# Altium PCB investigator_oring.PcbDoc
Units mil, origin at the board's own origin, x right, y up, seen from the top; angles counter-clockwise.
Board outline 2000 x 4500 mil, 2 copper layers (Top Layer, Bottom Layer); 28 components, 16 nets, 100 pads, 0 vias.
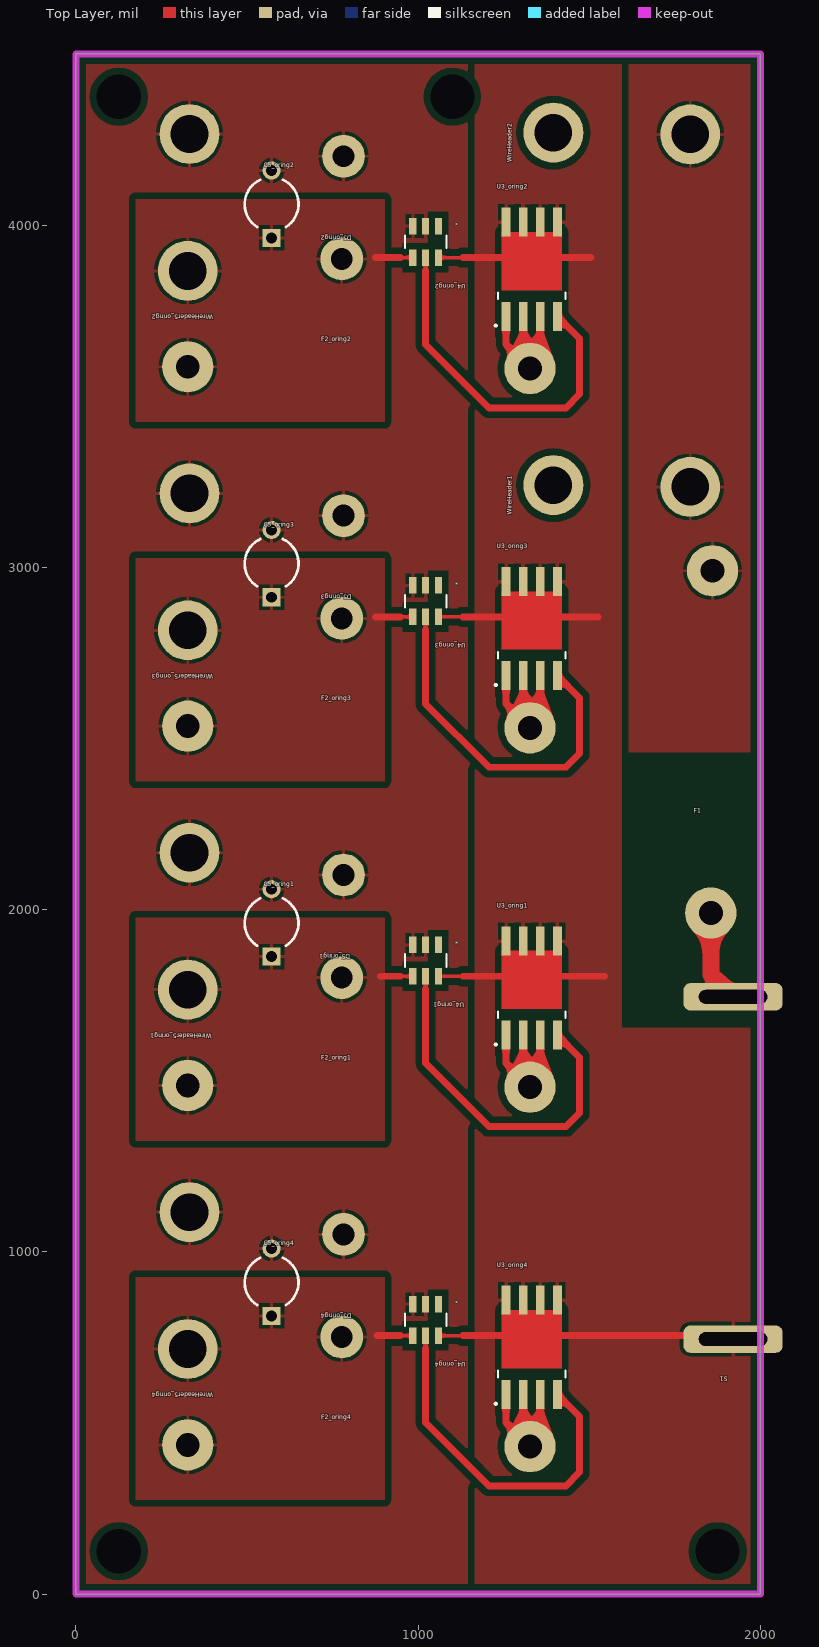
[diagram p0: Top Layer view]
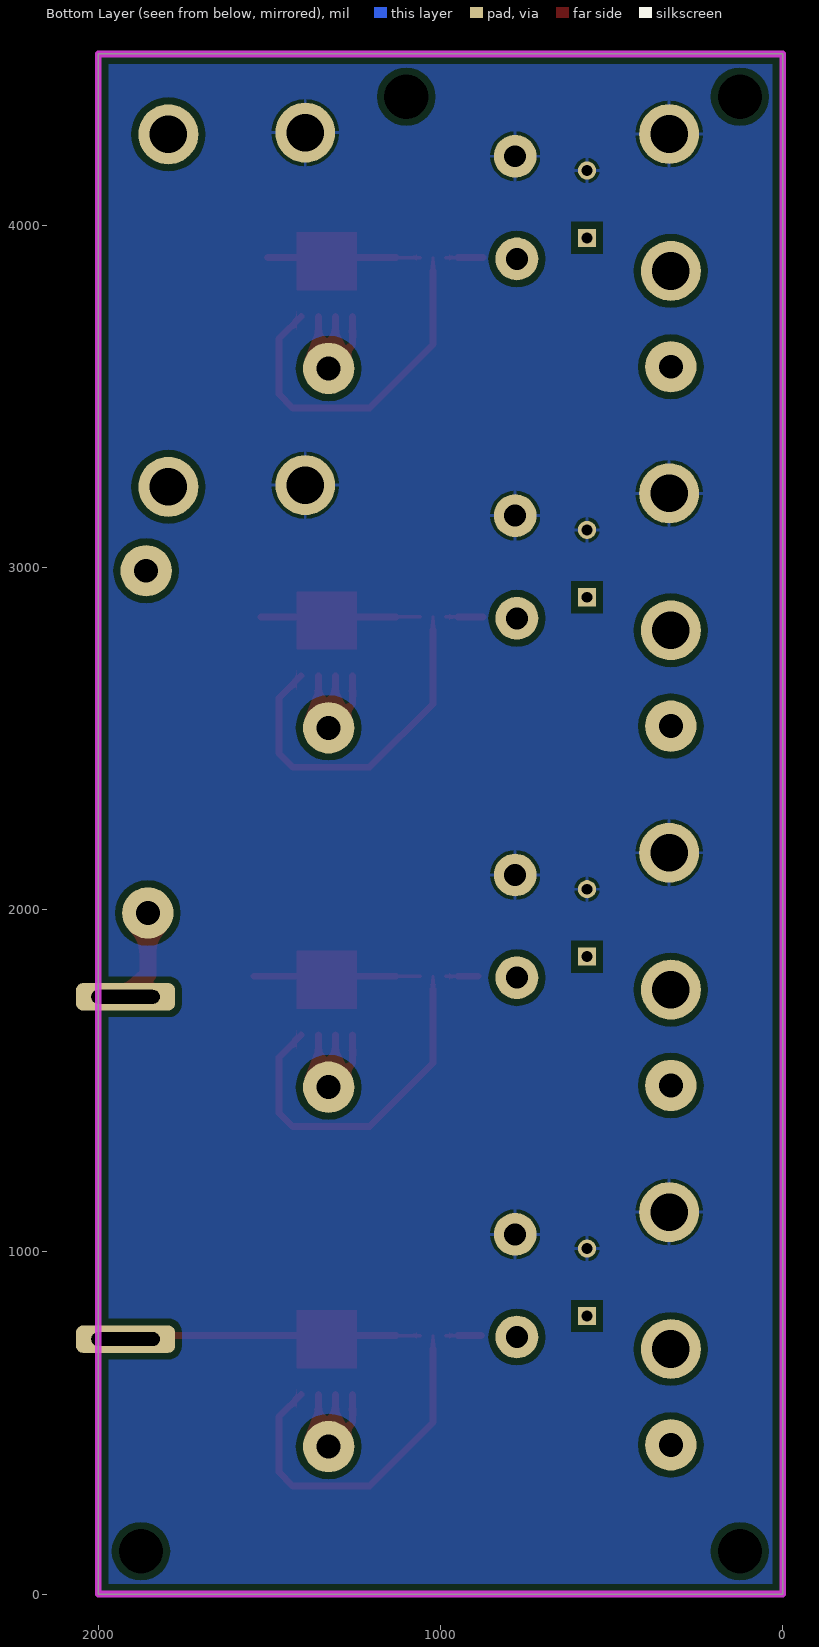
[diagram p1: Bottom Layer view, seen from below]

## Layer stack, top to bottom
Top Solder: solder mask 0.4, Solder Resist, Dk 3.5
Top Layer: signal copper 1.4
Dielectric 1: dielectric 12.6, FR-4, Dk 4.8
Bottom Layer: signal copper 1.4
Bottom Solder: solder mask 0.4, Solder Resist, Dk 3.5

## Board outline
0,0 0,4500 2000,4500 2000,0

## Design rules (kind name [scope] priority, off if disabled: settings)
Clearance SmallStuff [(HasFootprint('DQJ8') OR HasFootprint('MK06A') OR HasFootprint('C0805')) vs Not InPolygon] p1: gap=7
Clearance [All] p2: gap=20
PolygonConnect [All] p1: connectstyle=Relief reliefconductorwidth=10 reliefentries=4 polygonreliefangle="90 Angle" airgapwidth=10
RoomDefinition LM5050_ROOM [InComponentClass('LM5050_ROOM')] p1: confinementstyle=ConfineIn formatcopy=TRUE lockcomponents=FALSE outline 948.19,717 948.19,885 1130,885 1130,717
RoomDefinition oring4 [InComponentClass('oring4')] p2: confinementstyle=ConfineIn formatcopy=TRUE lockcomponents=FALSE outline 151.69,251 1501.69,251 1501.69,1221 151.69,1221
RoomDefinition oring3 [InComponentClass('oring3')] p3: confinementstyle=ConfineIn formatcopy=TRUE lockcomponents=FALSE outline 151.69,2351 1501.69,2351 1501.69,3321 151.69,3321
RoomDefinition oring2 [InComponentClass('oring2')] p4: confinementstyle=ConfineIn formatcopy=TRUE lockcomponents=FALSE outline 151.69,3401 1501.69,3401 1501.69,4371 151.69,4371
RoomDefinition oring1 [InComponentClass('oring1')] p5: confinementstyle=ConfineIn formatcopy=TRUE lockcomponents=FALSE outline 151.69,1301 1501.69,1301 1501.69,2271 151.69,2271
RoutingVias [All] p1: holewidth=28 width=50 viastyle="Through Hole" minholewidth=28 minwidth=50 maxholewidth=28 maxwidth=50
SMDNeckDown [All] p1: percent=75.000
SolderMaskExpansion [All] p1: expansion=4
Width SmallWidth [TouchesRoom('LM5050_ROOM')] p1: maxlimit=50 minlimit=5 preferedwidth=10 minimp=50.000000 maximp=50.000000 favimp=50.000000
Width [All] p2: maxlimit=50 minlimit=20 preferedwidth=20 minimp=50.000000 maximp=50.000000 favimp=50.000000
30 further rules are at their usual default settings.

## Classes and differential pairs
component class "Room Definition 1": U4_oring4
component class investigator_oring: F1 S1 WireHeader1 WireHeader2
component class oring1: C5_oring1 D5_oring1 F2_oring1 U3_oring1 U4_oring1 WireHeader5_oring1
component class oring2: C5_oring2 D5_oring2 F2_oring2 U3_oring2 U4_oring2 WireHeader5_oring2
component class oring3: C5_oring3 D5_oring3 F2_oring3 U3_oring3 U4_oring3 WireHeader5_oring3
component class oring4: C5_oring4 D5_oring4 F2_oring4 U3_oring4 U4_oring4 WireHeader5_oring4
net class VORED[1..4]: VORED4
channel class oring_circuit: oring1 oring2 oring3 oring4

## Components (designator, comment, footprint, x,y, rotation, side; value= is the part's Value field where it differs from the comment)
C5_oring1 "Cap2" CAPR5-4X5 571.69,1961 r90 top (schematic designator C5)
C5_oring2 "Cap2" CAPR5-4X5 571.69,4061 r90 top (schematic designator C5)
C5_oring3 "Cap2" CAPR5-4X5 571.69,3011 r90 top (schematic designator C5)
C5_oring4 "Cap2" CAPR5-4X5 571.69,911 r90 top (schematic designator C5)
D5_oring1 "D Schottky" DIODE 781.69,2101 r270 top (schematic designator D5)
D5_oring2 "D Schottky" DIODE 781.69,4201 r270 top (schematic designator D5)
D5_oring3 "D Schottky" DIODE 781.69,3151 r270 top (schematic designator D5)
D5_oring4 "D Schottky" DIODE 781.69,1051 r270 top (schematic designator D5)
F1 "Fuse 2" FUSE 1855,1990 r90 top
F2_oring1 "Fuse 2" FUSE 326.69,1486 r0 top (schematic designator F2)
F2_oring2 "Fuse 2" FUSE 326.69,3586 r0 top (schematic designator F2)
F2_oring3 "Fuse 2" FUSE 326.69,2536 r0 top (schematic designator F2)
F2_oring4 "Fuse 2" FUSE 326.69,436 r0 top (schematic designator F2)
S1 "SW-SPST" switch 1920,1245 r180 top
U3_oring1 "CSD17522Q5A_DQJ_" DQJ8 1331.69,1771 r90 top (schematic designator U3)
U3_oring2 "CSD17522Q5A_DQJ_" DQJ8 1331.69,3871 r90 top (schematic designator U3)
U3_oring3 "CSD17522Q5A_DQJ_" DQJ8 1331.69,2821 r90 top (schematic designator U3)
U3_oring4 "CSD17522Q5A_DQJ_" DQJ8 1331.69,721 r90 top (schematic designator U3)
U4_oring1 "LM5050-2_DDC_6" MK06A 1021.69,1851 r270 top (schematic designator U4)
U4_oring2 "LM5050-2_DDC_6" MK06A 1021.69,3951 r270 top (schematic designator U4)
U4_oring3 "LM5050-2_DDC_6" MK06A 1021.69,2901 r270 top (schematic designator U4)
U4_oring4 "LM5050-2_DDC_6" MK06A 1021.69,801 r270 top (schematic designator U4)
WireHeader1 "14 Gauge WIre" WireHeader 1795,3235 r180 top
WireHeader2 "14 Gauge WIre" WireHeader 1795,4265 r180 top
WireHeader5_oring1 "14 Gauge WIre" WireHeader 331.69,2166 r270 top (schematic designator WireHeader5)
WireHeader5_oring2 "14 Gauge WIre" WireHeader 331.69,4266 r270 top (schematic designator WireHeader5)
WireHeader5_oring3 "14 Gauge WIre" WireHeader 331.69,3216 r270 top (schematic designator WireHeader5)
WireHeader5_oring4 "14 Gauge WIre" WireHeader 331.69,1116 r270 top (schematic designator WireHeader5)

## Footprints (in the part's own frame and the unit in brackets; to place one, negate y for a bottom-side part, rotate by r counter-clockwise, add the part's x,y. Pads: shape width x height; smd on the part's side, far side on the other; paste and mask are expansions set on the pad)
CAPR5-4X5 [mm] "Capacitor; 2 Leads"
  rect 1.35x1.35 hole 0.8: 1(-2.5,0)
  round 1.35 hole 0.8: 2(2.5,0)
  silkscreen extent -1.69,-2 1.82,2
DIODE [mil]
  round 125 hole 64: 1(0,0) 2(300,-5)
DQJ8 [mm]
  rect 2.154x0.65 smd paste-0.1: 1(-3.497,1.905) 2(-3.497,0.635) 3(-3.497,-0.635) 4(-3.497,-1.905) 5(3.497,-1.905) 6(3.497,-0.635) 7(3.497,0.635) 8(3.497,1.905)
  Top Layer region: 2.745,0 2.745,2.23 -1.545,2.23 -1.545,0
  Top Layer region: 2.745,0 2.745,-2.23 -1.545,-2.23 -1.545,0
  silkscreen extent -4.27,-2.5 -1.74,2.74
FUSE [mil]
  round 150 hole 70: 1(0,0) 2(1000,-5)
MK06A [mil]
  rect 48x21 smd: 1(-46,37.4) 2(-46,0) 3(-46,-37.4) 4(46,-37.4) 5(46,0) 6(46,37.4)
  silkscreen extent -18,-60 18,61
switch [mil]
  rrect50% 290x80 hole 40 slot 200 at 0 deg: 1(0,500) 2(0,-500)
WireHeader [mil]
  round 175 hole 110: 1(0,0) 2(400,-5)

## Part data
C5_oring1 C5_oring2 C5_oring3 C5_oring4: "Capacitor"
D5_oring1 D5_oring2 D5_oring3 D5_oring4: "Schottky Diode"
F1 F2_oring1 F2_oring2 F2_oring3 F2_oring4: "Fuse"
S1: "Single-Pole, Single-Throw Switch"
U3_oring1 U3_oring2 U3_oring3 U3_oring4 U4_oring1 U4_oring2 U4_oring3 U4_oring4: "Imported"
WireHeader1 WireHeader2 WireHeader5_oring1 WireHeader5_oring2 WireHeader5_oring3 WireHeader5_oring4: library part WireHeader

## Free pads (board coordinates)
  round 60 hole 129: 1(1100,4375) 2(1875,125) 4(125,4375)
  round 0 hole 129: 3(125,125)

## Nets (pads, with @x,y where several pads share a name; then routed paths per layer and width w, separated by ;. In a path a pad name is that pad's centre, name@x,y a point inside that pad or via, vN(x,y) a via of type N, cw(c..) or ccw(c..) an arc to the next point about the centre after c; other vN are vias at no path point)
12V_UNREG: F1.2 WireHeader1.1 WireHeader2.1
BAT_oring1: C5_oring1.1 D5_oring1.2 F2_oring1.1 U4_oring1.4 WireHeader5_oring1.2 | length 94.3
  Top Layer w10: 948.19,1805 U4_oring1.4
  Top Layer w20: 890,1805 948.19,1805
BAT_oring2: C5_oring2.1 D5_oring2.2 F2_oring2.1 U4_oring2.4 WireHeader5_oring2.2 | length 109.3
  Top Layer w10: 948.19,3905 U4_oring2.4
  Top Layer w20: 875,3905 948.19,3905
BAT_oring3: C5_oring3.1 D5_oring3.2 F2_oring3.1 U4_oring3.4 WireHeader5_oring3.2 | length 109.3
  Top Layer w10: 948.19,2855 U4_oring3.4
  Top Layer w20: 875,2855 948.19,2855
BAT_oring4: C5_oring4.1 D5_oring4.2 F2_oring4.1 U4_oring4.4 WireHeader5_oring4.2 | length 104.3
  Top Layer w10: 948.19,755 U4_oring4.4
  Top Layer w20: 880,755 948.19,755
GND: C5_oring1.2 C5_oring2.2 C5_oring3.2 C5_oring4.2 D5_oring1.1 D5_oring2.1 D5_oring3.1 D5_oring4.1 U4_oring1.2 U4_oring1.3 U4_oring2.2 U4_oring2.3 U4_oring3.2 U4_oring3.3 U4_oring4.2 U4_oring4.3 WireHeader1.2 WireHeader2.2 WireHeader5_oring1.1 WireHeader5_oring2.1 WireHeader5_oring3.1 WireHeader5_oring4.1
NetF1_1: F1.1 S1.2 | length 271.9
  Top Layer w50: F1.1 1855,1810 S1.2
NetF2_oring1_2: F2_oring1.2 U3_oring1.1 U3_oring1.2 U3_oring1.3 | length 478.4
  Top Layer w20: U3_oring1.1 1256.69,1551 F2_oring1.2@1306.69,1501 ; U3_oring1.2 F2_oring1.2@1306.69,1501 ; U3_oring1.3 1356.69,1511 F2_oring1.2 F2_oring1.2@1306.69,1501
NetF2_oring2_2: F2_oring2.2 U3_oring2.1 U3_oring2.2 U3_oring2.3 | length 478.4
  Top Layer w20: U3_oring2.1 1256.69,3651 F2_oring2.2@1306.69,3601 ; U3_oring2.2 F2_oring2.2@1306.69,3601 ; U3_oring2.3 1356.69,3611 F2_oring2.2 F2_oring2.2@1306.69,3601
NetF2_oring3_2: F2_oring3.2 U3_oring3.1 U3_oring3.2 U3_oring3.3 | length 478.4
  Top Layer w20: U3_oring3.1 1256.69,2601 F2_oring3.2@1306.69,2551 ; U3_oring3.2 F2_oring3.2@1306.69,2551 ; U3_oring3.3 1356.69,2561 F2_oring3.2 F2_oring3.2@1306.69,2551
NetF2_oring4_2: F2_oring4.2 U3_oring4.1 U3_oring4.2 U3_oring4.3 | length 478.4
  Top Layer w20: U3_oring4.1 1256.69,501 F2_oring4.2@1306.69,451 ; U3_oring4.2 F2_oring4.2@1306.69,451 ; U3_oring4.3 1356.69,461 F2_oring4.2 F2_oring4.2@1306.69,451
NetU3_oring1_4: U3_oring1.4 U4_oring1.5 | length 1051.4
  Top Layer w10: 1021.69,1767 U4_oring1.5
  Top Layer w20: 1021.69,1767 1021.69,1551 1206.69,1366 1431.69,1366 1471.69,1406 1471.69,1568.32 U3_oring1.4
NetU3_oring2_4: U3_oring2.4 U4_oring2.5 | length 1051.4
  Top Layer w10: 1021.69,3867 U4_oring2.5
  Top Layer w20: 1021.69,3867 1021.69,3651 1206.69,3466 1431.69,3466 1471.69,3506 1471.69,3668.32 U3_oring2.4
NetU3_oring3_4: U3_oring3.4 U4_oring3.5 | length 1051.4
  Top Layer w10: 1021.69,2817 U4_oring3.5
  Top Layer w20: 1021.69,2817 1021.69,2601 1206.69,2416 1431.69,2416 1471.69,2456 1471.69,2618.32 U3_oring3.4
NetU3_oring4_4: U3_oring4.4 U4_oring4.5 | length 1051.4
  Top Layer w10: 1021.69,717 U4_oring4.5
  Top Layer w20: 1021.69,717 1021.69,501 1206.69,316 1431.69,316 1471.69,356 1471.69,518.32 U3_oring4.4
VORED4: S1.1 U3_oring1.5 U3_oring1.6 U3_oring1.7 U3_oring1.8 U3_oring2.5 U3_oring2.6 U3_oring2.7 U3_oring2.8 U3_oring3.5 U3_oring3.6 U3_oring3.7 U3_oring3.8 U3_oring4.5 U3_oring4.6 U3_oring4.7 U3_oring4.8 U4_oring1.6 U4_oring2.6 U4_oring3.6 U4_oring4.6 | length 2268.7
  Top Layer w10: U4_oring4.6 1130,755 ; U4_oring1.6 1130,1805 ; U4_oring3.6 1130,2855 ; U4_oring2.6 1130,3905
  Top Layer w20: 1130,755 1920,755 S1.1 ; 1130,1805 1545,1805 ; 1130,2855 1525,2855 ; 1130,3905 1505,3905
pads on no net: U4_oring1.1 U4_oring2.1 U4_oring3.1 U4_oring4.1

## Polygon pours and split planes (outlines as drawn)
GND on Top Layer "Ground" (solid, pour order 16): 0,0 1160,0 1160,4500 0,4500
BAT_oring2 on Top Layer "TopPlane" (solid, pour order 2): 175,3425 175,4076 901.69,4076 901.69,3425
BAT_oring3 on Top Layer "TopPlane" (solid, pour order 2): 175,2375 175,3026 901.69,3026 901.69,2375
BAT_oring1 on Top Layer "TopPlane" (solid, pour order 2): 175,1325 175,1976 901.69,1976 901.69,1325
BAT_oring4 on Top Layer "TopPlane" (solid, pour order 2): 175,275 175,926 901.69,926 901.69,275
12V_UNREG on Top Layer "TopPlane" (solid, pour order 10): 1600,4500 1600,2460 2000,2460 2000,4500
VORED4 on Top Layer "TopPlane" (solid, remove dead copper): 1165,0 1165,4500 1595,4500 1595,1655 2000,1655 2000,0
GND on Bottom Layer "Ground" (solid, pour order 18): 0,4500 2000,4500 2000,0 0,0

## Keep-outs
Keep-Out Layer:
  the board outline again, w20

## Text inside footprints (layer, text, board x,y; h text height)
U4_oring1: Top Overlay "*" at 1104.59,1907 h12.5 r270
U4_oring2: Top Overlay "*" at 1104.59,4007 h12.5 r270
U4_oring3: Top Overlay "*" at 1104.59,2957 h12.5 r270
U4_oring4: Top Overlay "*" at 1104.59,857 h12.5 r270